# EAGLE board meio (EAGLE 9.6.2)
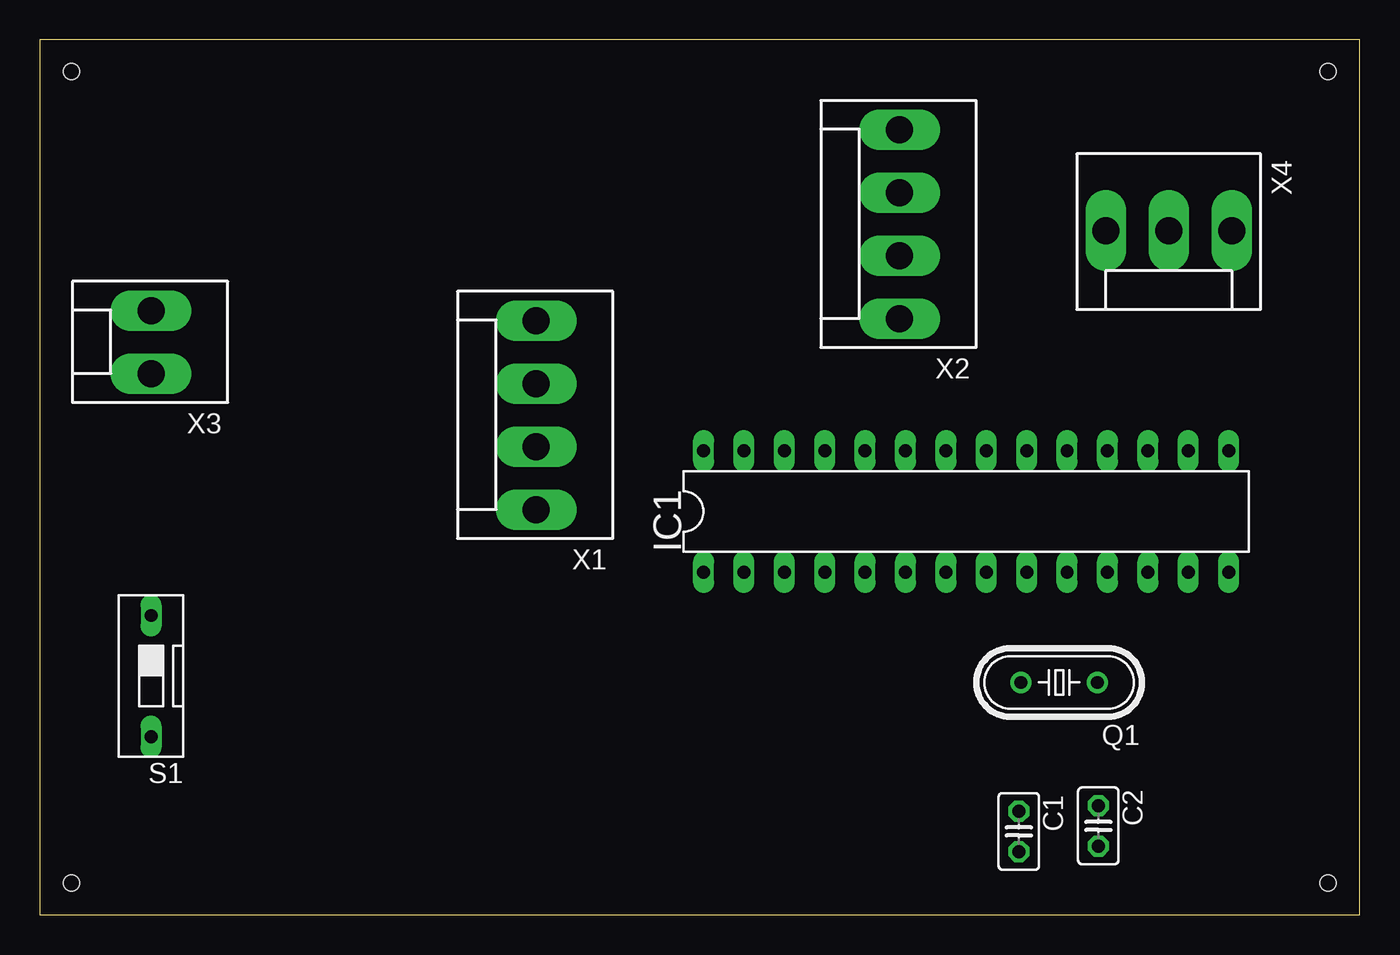
[diagram p0: board, top side]
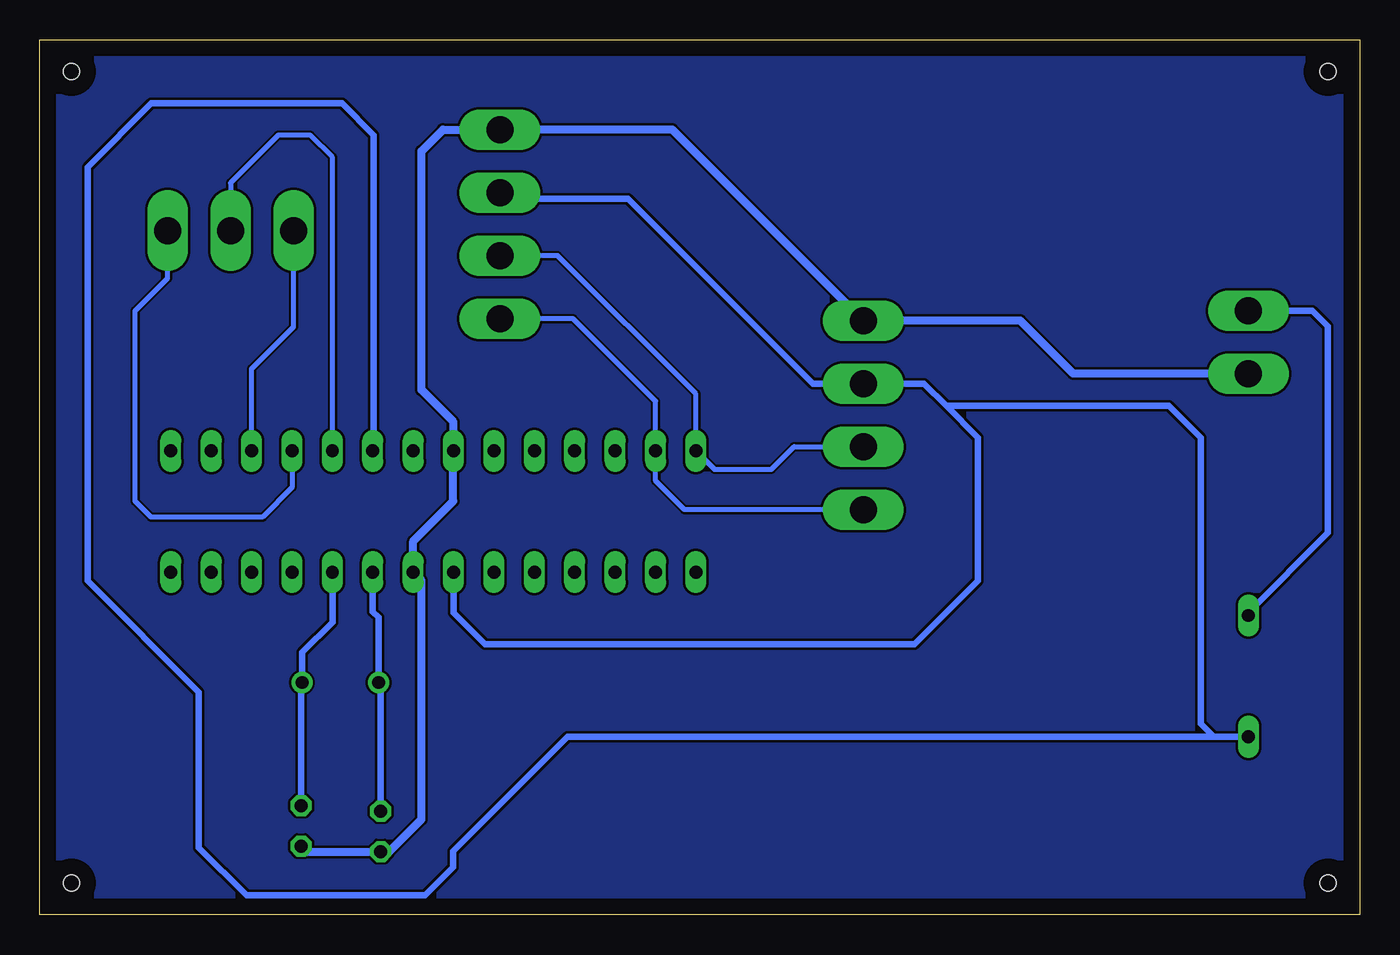
[diagram p1: board, bottom side, seen from below]

Size 83 x 55 mm. Coordinates in mm from the lower left corner, seen from the top.
Outline: 0,0 83,0 83,55 0,55 0,0
Copper layers (1*16): Top 0.035mm / dielectric 1.5mm / Bottom 0.035mm
Design rules "default": minimum track width 6mil, minimum drill 0.35mm, track to track 6mil, track to pad 6mil, pad to pad 6mil, via to via 6mil, smd to smd 6mil, copper to edge 40mil, drill to drill 6mil, minimum pad ring 10mil, minimum via ring 8mil, stop-mask expansion 4mil, vias tented up to drill 0mil, thermal gap 10mil
Holes 1 mm at 2,53 81,53 2,2 81,2

## Footprints (pad centres in the part's own frame; a part is rotated, then mirrored left to right if it is on the bottom)
C025-025X050 = drill 0.813 octagon: 1 -1.27,0; 2 1.27,0
DIL28-3 = drill 0.813 long: 1 -16.51,-3.81; 2 -13.97,-3.81; 3 -11.43,-3.81; 4 -8.89,-3.81; 5 -6.35,-3.81; 6 -3.81,-3.81; 7 -1.27,-3.81; 8 1.27,-3.81; 9 3.81,-3.81; 10 6.35,-3.81; 11 8.89,-3.81; 12 11.43,-3.81; 13 13.97,-3.81; 14 16.51,-3.81; 15 16.51,3.81; 16 13.97,3.81; 17 11.43,3.81; 18 8.89,3.81; 19 6.35,3.81; 20 3.81,3.81; 21 1.27,3.81; 22 -1.27,3.81; 23 -3.81,3.81; 24 -6.35,3.81; 25 -8.89,3.81; 26 -11.43,3.81; 27 -13.97,3.81; 28 -16.51,3.81
HC49/S = drill 0.813: 1 -2.413,0; 2 2.413,0
DS-01 = drill 0.813 long: 1 0,-3.81; 2 0,3.81
KK-156-4 = drill 1.7 pad 2.184 long: 1 -5.94,0; 2 -1.98,0; 3 1.98,0; 4 5.94,0
KK-156-2 = drill 1.7 pad 2.184 long: 1 -1.98,0; 2 1.98,0
KK-156-3 = drill 1.7 pad 2.184 long: 1 -3.96,0; 2 0,0; 3 3.96,0

## Placement (x,y rotation side)
C1  [C025-025X050]  61.56,5.24 270 top
C2  [C025-025X050]  66.56,5.59 270 top
IC1  ATMEGA328-20P  [DIL28-3]  58.25,25.35 0 top
Q1  [HC49/S]  64.1,14.6 180 top
S1  [DS-01]  7,15 180 top
X1  [KK-156-4]  31.22,31.41 90 top
X2  [KK-156-4]  54.06,43.41 90 top
X3  [KK-156-2]  7,36 90 top
X4  [KK-156-3]  71,43 180 top

## Library data of the parts
C1 C2 = rcl; SPICEPREFIX: C
IC1 = ATMEGA328P
Q1 = crystal; OC_FARNELL: 1667008; OC_NEWARK: unknown
S1 = switch-dil; OC_FARNELL: unknown; OC_NEWARK: unknown
X1-X4 = con-molex; MF: MOLEX; OC_FARNELL: unknown; OC_NEWARK: unknown

## Nets
+5V: IC1.7 IC1.20 S1.2 X1.3 X2.3
AGND: C1.2 C2.2 IC1.8 IC1.22 X1.4 X2.4 X3.1
N$1: C1.1 IC1.9 Q1.2
N$2: C2.1 IC1.10 Q1.1
N$3: IC1.27 X1.1 X2.1
N$4: IC1.28 X1.2 X2.2
N$5: S1.1 X3.2
N$6: IC1.18 X4.1
N$7: IC1.19 X4.2
N$8: IC1.17 X4.3

## Tracks (layer width: path | path; a pad name or v marks a point on that pad's centre or on a via)
+5V
  Bottom 0.406: S1.2 9.19,11.19 | 9.19,11.19 10,12 10,30 12,32 26,32 | 26,32 27.39,33.39 X1.3 34.39,33.39 46,45 53.67,45 X2.3 | IC1.7 56.98,18.98 55,17 28,17 24,21 24,30 26,32 | 9.19,11.19 49.81,11.19 57,4 57,3 58.78,1.22 70,1.22 73,4.22 73,14 80,21 80,47 76,51 64,51 62,49 62,29.22 IC1.20
AGND
  Bottom 0.508: X3.1 18.02,34.02 21.35,37.35 X1.4 43.22,49.35 X2.4 57.65,49.35 59,48 59,33 56.98,30.98 IC1.22 57,29.14 57,26 59.52,23.48 IC1.8 59,21.02 59,6 61.03,3.97 C1.2 66.21,3.97 C2.2
GND
  pour Bottom: 83,0 0,0 0,55 83,55
N$1
  Bottom 0.406: IC1.9 62.06,19.06 61.69,18.69 Q1.2 61.56,14.47 C1.1
N$2
  Bottom 0.406: IC1.10 64.6,18.4 66.51,16.49 Q1.1 66.56,14.55 C2.1
N$3
  Bottom 0.305: X1.1 42.47,25.47 44.28,27.28 IC1.27 44.28,32.28 49.47,37.47 X2.1
N$4
  Bottom 0.305: X2.2 50.43,41.43 41.74,32.74 IC1.28 40.58,28 37,28 35.57,29.43 X1.2
N$5
  Bottom 0.406: X3.2 2.98,37.98 2,37 2,24 7,19 S1.1
N$6
  Bottom 0.305: IC1.18 67.14,26.86 69,25 76,25 77,26 77,37.96 74.96,40 X4.1
N$7
  Bottom 0.305: IC1.19 64.6,47.6 66,49 68,49 71,46 X4.2
N$8
  Bottom 0.305: IC1.17 69.68,34.32 67.04,36.96 X4.3